# Altium PCB PCB2.PcbDoc
Units mm, origin at the board's own origin, x right, y up, seen from the top; angles counter-clockwise.
Board outline 152.4 x 101.6 mm, 2 copper layers (Top Layer, Bottom Layer); 27 components, 18 nets, 142 pads, 14 vias.
Unrouted connection lines stored in the file: 10.
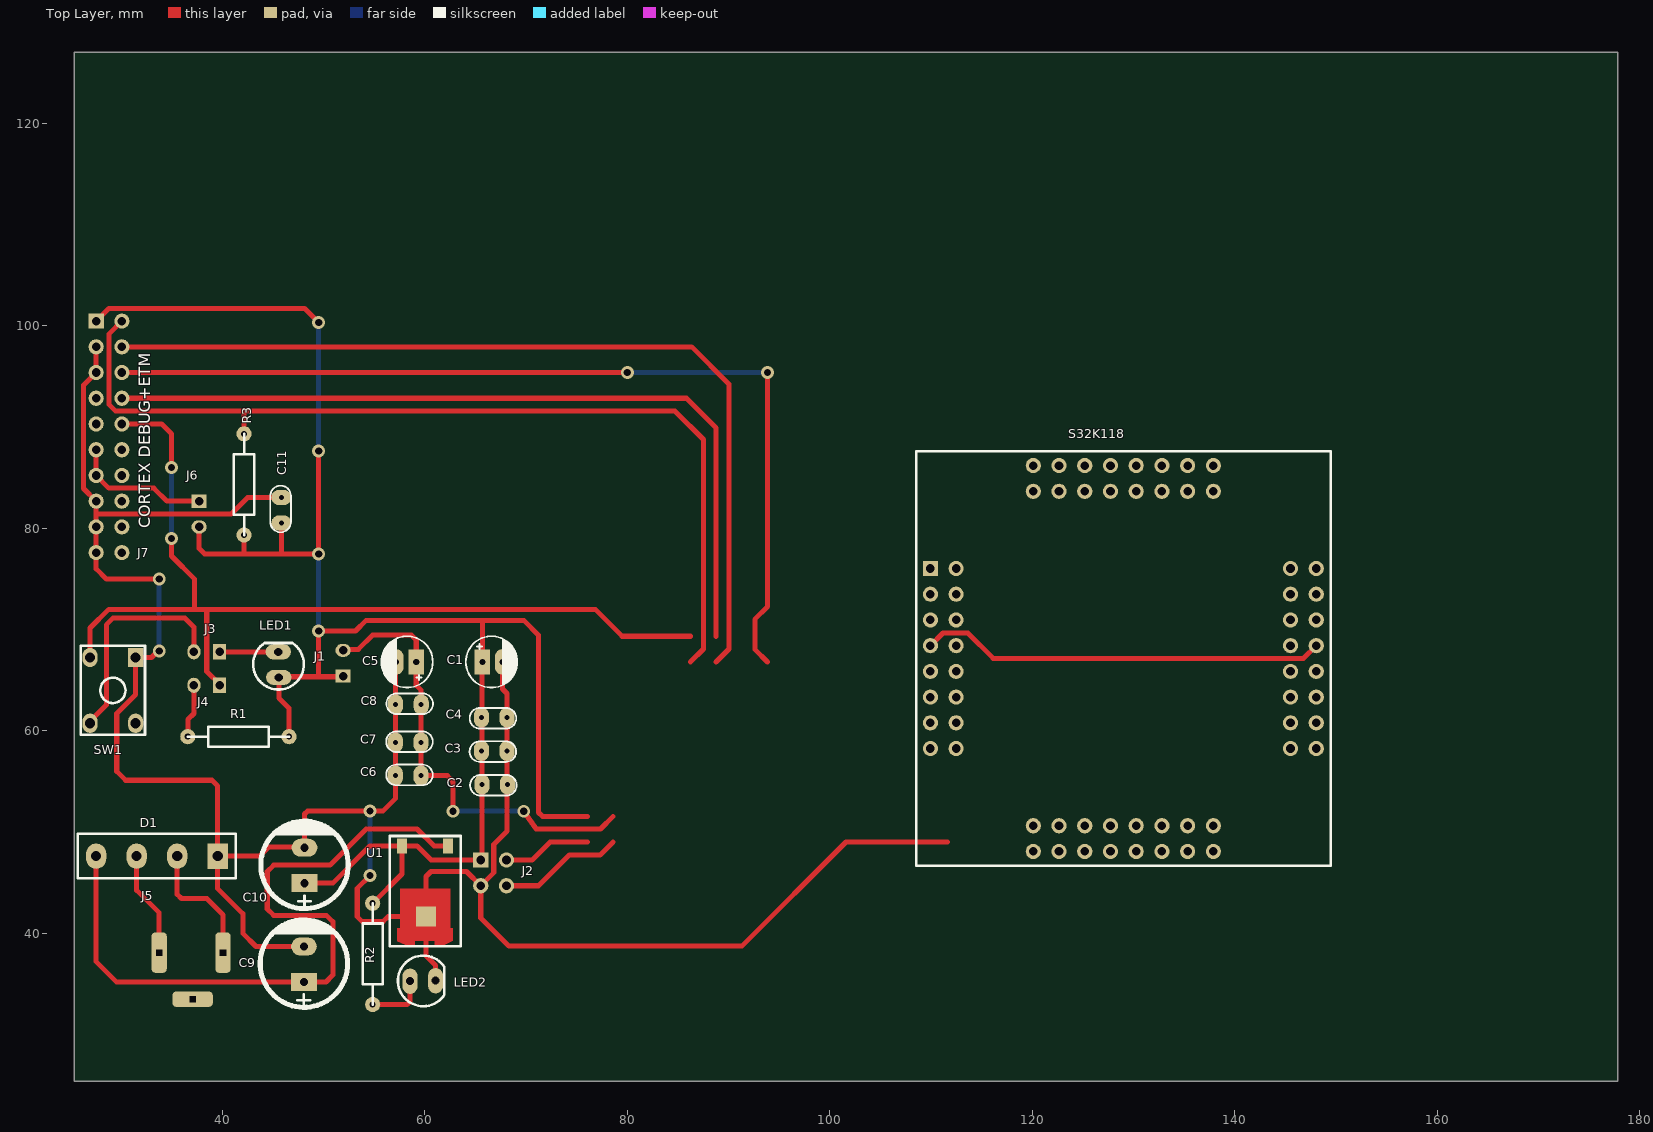
[diagram p0: Top Layer view]
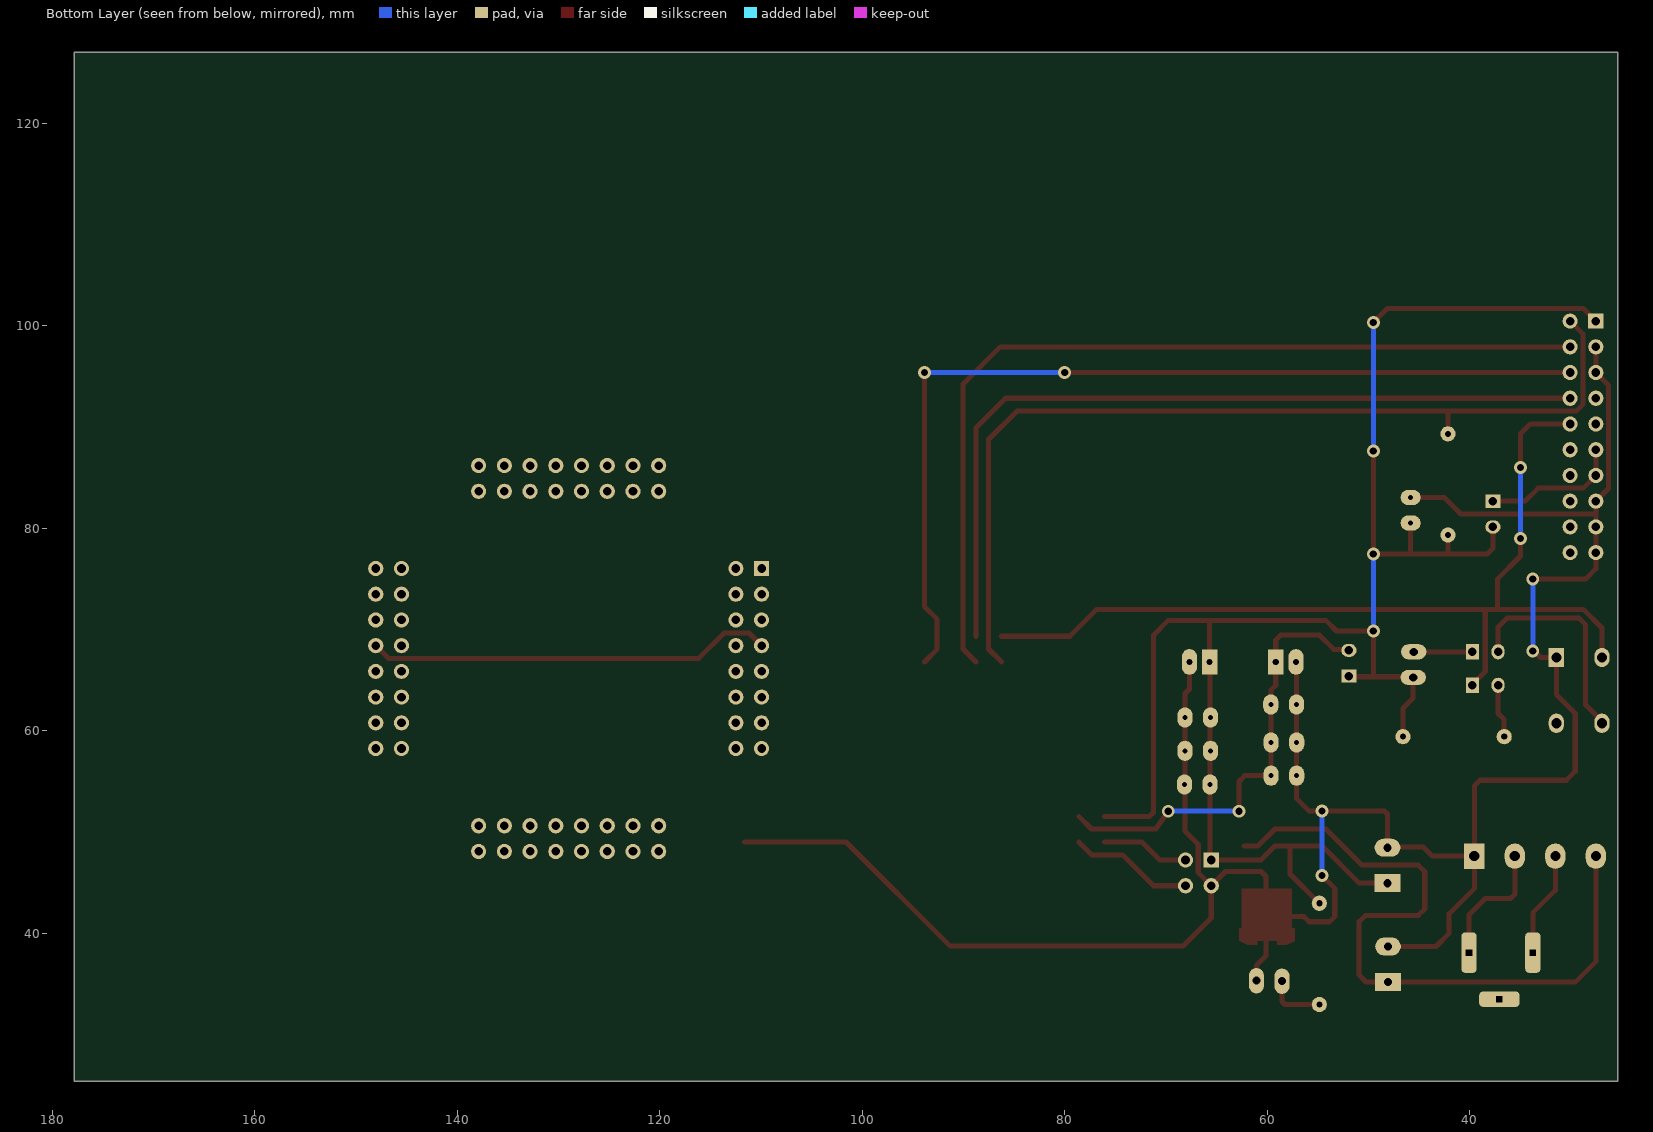
[diagram p1: Bottom Layer view, seen from below]

## Layer stack, top to bottom
Top Solder: solder mask 0.0102, Solder Resist, Dk 3.5
Top Layer: signal copper 0.0356
Dielectric 1: dielectric 0.32, FR-4, Dk 4.8
Bottom Layer: signal copper 0.0356
Bottom Solder: solder mask 0.0102, Solder Resist, Dk 3.5

## Board outline
25.4,25.4 177.8,25.4 177.8,127 25.4,127

## Design rules (kind name [scope] priority, off if disabled: settings)
Clearance [All] p1: gap=0.254 ignorepadtopadclearanceinfootprint=FALSE except(0: Arc-Hole Track-Hole SMDPad-Hole THPad-Hole Via-Hole Fill-Hole Poly-Hole Region-Hole Text-Hole)
PolygonConnect [All] p1: connectstyle=Relief reliefconductorwidth=0.254 reliefentries=4 polygonreliefangle="90 Angle" airgapwidth=0.254
RoutingVias [All] p1: holewidth=0.711 width=1.27 viastyle="Through Hole" minholewidth=0.711 minwidth=1.27 maxholewidth=0.711 maxwidth=1.27
SolderMaskExpansion [All] p1: expansion=0.102
Width [All] p1: maxlimit=1 minlimit=0.5 preferedwidth=0.5
30 further rules are at their usual default settings.

## Components (designator, comment, footprint, x,y, rotation, side; value= is the part's Value field where it differs from the comment)
C1 "10uF" "CP 4mm" 66.691,66.802 r0 top
C2 "CN 33pF" CN5 66.975,54.725 r0 top
C3 "CN 33pF" CN5 66.925,58.05 r0 top
C4 "CN 33pF" CN5 66.929,61.341 r0 top
C5 "10uF" "CP 4mm" 58.166,66.802 r180 top
C6 "CN 33pF" CN5 58.3,55.55 r180 top
C7 "CN 33pF" CN5 58.3,58.825 r180 top
C8 "CN 33pF" CN5 58.325,62.575 r180 top
C9 "470uF" "CP 7mm" 48.077,36.957 r90 top
C10 "470uF" "CP 7mm" 48.133,46.708 r90 top
C11 "0.1uF" CN5 45.872,81.718 r270 top
D1 "Diode" DIODE_bridge_2a 33.56,47.625 r180 top
J1 "Header 1x2 TH Pitch 2.54mm" "Header 1x2 TH Pitch 2.54mm" 51.943,66.675 r90 top
J2 "Header 2x2 TH Pitch 2.54mm" "Header 2x2 TH Pitch 2.54mm" 66.802,45.974 r0 top
J3 "Header 1x2 TH Pitch 2.54mm" "Header 1x2 TH Pitch 2.54mm" 38.481,67.803 r180 top
J4 "Header 1x2 TH Pitch 2.54mm" "Header 1x2 TH Pitch 2.54mm" 38.481,64.495 r180 top
J5 "Connector" JACK-DC 26.282,38.1 r270 top
J6 "Header 1x2 TH Pitch 2.54mm" "Header 1x2 TH Pitch 2.54mm" 37.719,81.407 r270 top
J7 "Header 10x2 TH Pitch 2.54mm" "Header 10x2 TH Pitch 2.54mm" 28.829,89.027 r0 top
LED1 "5mm" "LED 5mm BLUE" 45.568,66.54 r90 top
LED2 "5mm" "LED 5mm BLUE" 59.817,35.306 r0 top
R1 "10k" "RES 0.25A" 41.606,59.421 r0 top
R2 "10k" "RES 0.25A" 54.864,37.973 r90 top
R3 "10K" "RES 0.25A" 42.164,84.328 r270 top
S32K118 "Arm® Cortex®-M" "QFP64_0.5 SOCKET PINOUT" 128.985,67.14 r180 top
SW1 "Button" BUTTON_HOLE_5.0mm 29.21,63.993 r0 top
U1 "LM7805" TO252-3 60.025,44.055 r180 top

## Footprints (in the part's own frame and the unit in brackets; to place one, negate y for a bottom-side part, rotate by r counter-clockwise, add the part's x,y. Pads: shape width x height; smd on the part's side, far side on the other; paste and mask are expansions set on the pad)
BUTTON_HOLE_5.0mm [mm]
  rect 1.5x1.9 hole 1: 1(2.25,3.25)
  oval 1.5x1.9 hole 1: 2(2.25,-3.25) 3(-2.25,3.25) 4(-2.25,-3.25)
  silkscreen extent -3.17,-4.4 3.17,4.43, body extent -3,-3.86 3,3.86, height 5
CN5 [mm]
  oval 1.5x2 hole 0.5: 1(-1.325,-0.025) 2(1.2,-0.025)
  silkscreen extent -2.49,-1.12 2.1,0.92, body extent -3,-0.86 2.84,0.83, height 6.73
"CP 4mm" [mm]
  rect 1.5x2.5 hole 0.6: 1(-1,0)
  oval 1.5x2.54 hole 0.6: 2(1,0)
  silkscreen extent -2.63,-2.54 2.51,2.54, body extent -2.53,-2.53 2.52,2.53, height 7.29
"CP 7mm" [mil]
  rect 70x100 hole 32: 1(-68.9,0)
  oval 70x100 hole 32: 2(68.9,0)
  silkscreen extent -168,-170 172,170, body extent -158,-157 157,157, height 446
DIODE_bridge_2a [mm]
  rect 2x2.5 hole 1: 1(-6,0)
  oval 2x2.5 hole 1: 2(-2,0) 3(2,0) 4(6,0)
  silkscreen extent -7.8,-2.2 7.8,2.2, body extent -7.5,-1.9 7.5,1.9, height 11
"Header 1x2 TH Pitch 2.54mm" [mm]
  rect 1.3x1.5 hole 0.85: 1(-1.27,0)
  oval 1.3x1.5 hole 0.85: 2(1.27,0)
  body extent -2.54,-1.27 2.54,1.27, height 9.5
"Header 2x2 TH Pitch 2.54mm" [mm]
  rect 1.5x1.5 hole 0.85: 1(-1.27,1.27)
  round 1.5 hole 0.85: 2(1.27,1.27) 3(-1.27,-1.27) 4(1.27,-1.27)
  body extent -2.54,-2.54 2.54,2.54, height 9.5
"Header 10x2 TH Pitch 2.54mm" [mm]
  rect 1.5x1.5 hole 0.85: 1(-1.27,11.43)
  round 1.5 hole 0.85: 2(1.27,11.43) 3(-1.27,8.89) 4(1.27,8.89) 5(-1.27,6.35) 6(1.27,6.35) 7(-1.27,3.81) 8(1.27,3.81) 9(-1.27,1.27) 10(1.27,1.27) 11(-1.27,-1.27) 12(1.27,-1.27) 13(-1.27,-3.81) 14(1.27,-3.81) 15(-1.27,-6.35) 16(1.27,-6.35) 17(-1.27,-8.89) 18(1.27,-8.89) 19(-1.27,-11.43) 20(1.27,-11.43)
  body extent -2.54,-12.7 2.54,12.7, height 9.5
JACK-DC [mm]
  rrect50% 1.5x4 hole 0.6 square: 1(4.6,10.8)
  rrect50% 4x1.5 hole 0.6 square: 2(0,7.5) 3(0,13.8)
  body extent -4.55,-0.78 4.85,14.43, height 11
"LED 5mm BLUE" [mm]
  oval 1.5x2.5 hole 0.8: 1(-1.262,-0.025) 2(1.263,0.025)
  silkscreen extent -2.46,-2.5 2.13,2.5, body extent -2.76,-2.82 2.56,2.83, height 8
"QFP64_0.5 SOCKET PINOUT" [mm]
  rect 1.5x1.5 hole 0.85: 1(19.05,-8.89)
  round 1.5 hole 0.85: 2(16.51,-8.89) 3(19.05,-6.35) 4(16.51,-6.35) 5(19.05,-3.81) 6(16.51,-3.81) 7(19.05,-1.27) 8(16.51,-1.27) 9(19.05,1.27) 10(16.51,1.27) 11(19.05,3.81) 12(16.51,3.81) 13(19.05,6.35) 14(16.51,6.35) 15(19.05,8.89) 16(16.51,8.89) 17(8.89,19.05) 18(8.89,16.51) 19(6.35,19.05) 20(6.35,16.51) 21(3.81,19.05) 22(3.81,16.51) 23(1.27,19.05) 24(1.27,16.51) 25(-1.27,19.05) 26(-1.27,16.51) 27(-3.81,19.05) 28(-3.81,16.51) 29(-6.35,19.05) 30(-6.35,16.51) 31(-8.89,19.05) 32(-8.89,16.51) 33(-19.05,8.89) 34(-16.51,8.89) 35(-19.05,6.35) 36(-16.51,6.35) 37(-19.05,3.81) 38(-16.51,3.81) 39(-19.05,1.27) 40(-16.51,1.27) 41(-19.05,-1.27) 42(-16.51,-1.27) 43(-19.05,-3.81) 44(-16.51,-3.81) 45(-19.05,-6.35) 46(-16.51,-6.35) 47(-19.05,-8.89) 48(-16.51,-8.89) 49(-8.89,-19.05) 50(-8.89,-16.51) 51(-6.35,-19.05) 52(-6.35,-16.51) 53(-3.81,-19.05) 54(-3.81,-16.51) 55(-1.27,-19.05) 56(-1.27,-16.51) 57(1.27,-19.05) 58(1.27,-16.51) 59(3.81,-19.05) 60(3.81,-16.51) 61(6.35,-19.05) 62(6.35,-16.51) 63(8.89,-19.05) 64(8.89,-16.51)
  silkscreen extent -20.48,-20.48 20.45,20.48, body extent -20.32,-20.32 20.32,20.32, height 9.5
"RES 0.25A" [mm]
  round 1.5 hole 0.6: 1(-5,0) 2(5,0)
  silkscreen extent -5,-1 5,1, body extent -5.3,-1.31 5.3,1.3, height 7.8
TO252-3 [mm]
  rect 1x1.5 smd: 1(-2.284,-4.568) 3(2.262,-4.568)
  rect 2x2 smd: 2(-0.1,2.4)
  Top Layer region: -1.954,5.186 -2.767,4.779 -2.767,3.535 -2.513,3.535 -2.513,-0.351 2.44,-0.351 2.44,3.535 2.745,3.535 2.745,4.814 1.932,5.186 0.992,5.186 0.992,4.779 -0.989,4.779 -0.989,5.186
  silkscreen extent -3.53,-5.56 3.48,5.33, body extent -3.39,-4.93 3.34,5.17, height 2.37

## Part data
C1 C5: library part "CP 4mm"
C9 C10: library part "CP 7mm"
C11: library part "CN 33pF", LatestRevisionDate=17-Jul-2002, LatestRevisionNote="Re-released for DXP Platform.", PackageDescription="Radial Cap, Thru-Hole; 2 Leads; 0.3 in Pin Spacing", PackageReference=RAD-0.3, Published=8-Jun-2000, Publisher="Altium Limited"
D1: library part "Diode Bridge1", DatasheetVersion=E2732B, LatestRevisionDate=29-May-2009, LatestRevisionNote="Sch pins A & K swapped.", PackageDescription="Bridge Rectifier; 4 Terminals; Body 9.4 x 9.4 mm (typ); Pitch 5.08 mm", PackageReference=D-38, Published=8-Jun-2000, Publisher="Altium Limited"
J5: library part JackDC
LED1 LED2: library part "LED 5mm"
R1 R2 R3: library part "Res 0.25W"
S32K118: library part S32K118, "S32K is a scalable family of AEC-Q100 qualified 32-bit Arm® Cortex®-M4F and Cortex-M0+ based MCUs targeted for general purpose automotive and high-reliability industrial applications."
C2 C3 C4 C6 C7 C8: LatestRevisionDate=17-Jul-2002, LatestRevisionNote="Re-released for DXP Platform.", PackageDescription="Radial Cap, Thru-Hole; 2 Leads; 0.3 in Pin Spacing", PackageReference=RAD-0.3, Published=8-Jun-2000, Publisher="Altium Limited"

## Via types
v1: diameter 1.27, hole 0.711, Top Layer to Bottom Layer, 14 vias

## Nets (pads, with @x,y where several pads share a name; then routed paths per layer and width w, separated by ;. In a path a pad name is that pad's centre, name@x,y a point inside that pad or via, vN(x,y) a via of type N, cw(c..) or ccw(c..) an arc to the next point about the centre after c; other vN are vias at no path point)
GND: C1.2 C2.2 C3.2 C4.2 C5.2 C6.2 C7.2 C8.2 C9.2 C10.2 C11.1 D1.1 J2.3 J7.3 J7.5 J7.15 J7.17 J7.19 LED2.2 S32K118.40 SW1.1 U1.2 | length 251.5
  Top Layer w0.5: J7.3 J7.5 26.305,94.123 26.305,83.931 J7.15 27.559,81.407 ; v1(33.782,67.893) 33.67,67.893 33.02,67.243 SW1.1 31.46,63.591 29.591,61.722 29.591,56.007 30.48,55.118 38.989,55.118 39.56,54.547 D1.1 ; v1(33.782,75) 28.559,75 27.559,76 J7.19 J7.17 27.559,81.407 ; C11.1 42.53,83.043 40.894,81.407 27.559,81.407 ; C9.2 43.335,38.707 42.037,40.005 42.037,41.936 39.56,44.413 D1.1 ; v1(54.61,45.72) 53.34,44.45 53.34,41.655 53.847,41.148 55.859,41.148 56.366,41.655 U1.2 ; C5.2 57.129,66.766 57.129,53.34 55.859,52.07 v1(54.61,52.07) 48.426,52.07 48.133,51.777 C10.2 48.077,48.514 44.577,48.514 43.688,47.625 D1.1 ; LED2.2 61.08,36.83 60.125,37.785 U1.2 ; C1.2 67.691,64.135 68.129,63.697 C4.2 68.129,58.025 68.129,54.7 68.129,50.095 66.818,48.784 66.818,45.99 J2.3 ; 111.633,49.022 101.6,49.022 91.313,38.735 68.326,38.735 65.532,41.529 J2.3 ; U1.2 60.125,45.615 60.611,46.101 64.135,46.101 J2.3
  Bottom Layer w0.5: v1(33.782,67.893) v1(33.782,75) ; v1(54.61,45.72) v1(54.61,52.07)
NetC5_1: C5.1 C6.1 C7.1 C8.1 J1.2 S32K118.8 | length 45.2
  Top Layer w0.5: J1.2 52.046,68.048 53.443,68.048 54.864,69.469 58.674,69.469 59.166,68.977 C5.1 59.166,64.495 59.618,64.043 C6.1@59.618,55.575 ; C6.1 62.23,55.575 62.798,55.007 v1(62.798,52.064) ; v1(69.783,52.064) 71.009,50.308 77.359,50.308 78.613,51.562
  Bottom Layer w0.5: v1(62.798,52.064) v1(69.783,52.064)
NetC9_1: C9.1 D1.4 U1.1 | length 71.2
  Top Layer w0.5: D1.4 27.56,37.21 29.591,35.179 48.049,35.179 C9.1 50.245,35.207 50.927,35.889 50.927,41.148 50.292,41.783 45.085,41.783 44.45,42.418 44.45,46.101 45.085,46.736 50.649,46.736 54.221,50.308 59.245,50.308 60.931,48.623 U1.1
NetD1_2: D1.2 J5.3 | length 12.9
  Top Layer w0.5: D1.2 35.56,43.854 35.98,43.434 38.481,43.434 40.082,41.833 J5.3
NetD1_3: D1.3 J5.2 | length 10.4
  Top Layer w0.5: D1.3 31.56,44.259 33.782,42.037 J5.2
NetJ2_2: J2.2 S32K118.9 | length 8.7
  Top Layer w0.5: J2.2 70.612,47.244 72.39,49.022 76.073,49.022
NetJ2_4: J2.4 S32K118.10 | length 12.3
  Top Layer w0.5: J2.4 71.247,44.704 74.279,47.736 77.327,47.736 78.613,49.022
NetJ3_1: J3.1 LED1.2 | length 5.8
  Top Layer w0.5: J3.1@39.828,67.93 39.955,67.803 LED1.2
NetJ3_2: J3.2 SW1.4 | length 22.1
  Top Layer w0.5: SW1.4 26.96,60.943 28.559,62.542 28.559,70.469 29.21,71.12 36.32,71.12 37.211,70.229 J3.2
NetJ4_2: J4.2 R1.1 | length 5.3
  Top Layer w0.5: R1.1 36.606,61.117 37.211,61.722 J4.2
NetLED2_1: LED2.1 R2.1 | length 5.8
  Top Layer w0.5: R2.1 58.246,32.973 58.554,33.281 LED2.1
PTA4/JTAG_TMS/SWD_DIO: J7.2 R3.1 S32K118.64 | length 93.6
  Top Layer w0.5: J7.2@30.122,100.48 J7.2 28.845,99.203 28.845,92.202 29.48,91.567 42.164,91.567 ; R3.1 42.164,91.567 ; 86.233,66.802 87.519,68.088 87.519,88.757 84.709,91.567 42.164,91.567
PTA5/TCLK1_2/RESET: J4.1 J7.10 S32K118.63 SW1.3 | length 95.7
  Top Layer w0.5: SW1.3 26.96,70.147 28.813,72 37.288,72 ; J7.10 34.031,90.297 35,89.328 v1(35,86) ; v1(35,79) 35,77.258 37.288,74.97 37.288,72 ; J4.1 39.751,64.595 38.481,65.865 38.481,72 ; 86.233,69.342 79.502,69.342 76.844,72 38.481,72 ; 37.288,72 38.481,72
  Bottom Layer w0.5: v1(35,79) v1(35,86)
PTA10/FTM1_CH4/JTAG_TDO/noetm_Trace_SWO: J7.6 S32K118.58 | length 93.4
  Top Layer w0.5: J7.6 v1(80.01,95.377) ; 93.853,66.802 92.599,68.056 92.599,71.009 93.853,72.263 v1(93.853,95.377)
  Bottom Layer w0.5: v1(80.01,95.377) v1(93.853,95.377)
PTC4/ACMP0_IN2/JTAG_TCLK/SWD_CLK: J7.4 S32K118.62 | length 89.4
  Top Layer w0.5: J7.4 86.36,97.917 90.043,94.234 90.043,68.072 88.773,66.802
PTC5/JTAG_TDI/RTC_CLKOUT: J7.8 S32K118.61 | length 80.5
  Top Layer w0.5: J7.8 85.852,92.837 88.773,89.916 88.773,69.342
TGT_PWR: J6.1 J7.11 J7.13 | length 13.8
  Top Layer w0.5: J7.11 J7.13 28.813,83.963 33.258,83.963 34.544,82.677 J6.1
VCC: C1.1 C2.1 C3.1 C4.1 C10.1 C11.2 J1.1 J2.1 J6.2 J7.1 LED1.1 R1.2 R2.2 R3.2 S32K118.7 S32K118.41 U1.3 | length 225.3
  Top Layer w0.5: J7.1 28.813,101.711 48.149,101.711 v1(49.53,100.33) ; J6.2 37.719,78.02 38.269,77.47 42.164,77.47 ; R3.2 42.164,77.47 ; C11.2 45.847,77.47 ; R1.2 46.606,62.23 45.593,63.243 LED1.1 45.657,65.341 49.53,65.341 ; C10.1 50.919,44.958 54.584,48.623 U1.3 ; v1(49.53,87.63) v1(49.53,77.47) 45.847,77.47 ; J1.1 51.88,65.341 49.53,65.341 ; R2.2 57.763,45.872 U1.3 ; 76.073,51.562 71.628,51.562 71.247,51.943 71.247,69.449 69.783,70.913 65.691,70.913 ; S32K118.7 111.189,69.664 113.634,69.664 116.142,67.156 146.781,67.156 S32K118.41 ; 42.164,77.47 45.847,77.47 ; 49.53,65.341 v1(49.53,69.85) 53.158,69.85 54.221,70.913 65.691,70.913 ; U1.3 59.255,48.623 60.634,47.244 J2.1 65.65,47.362 C2.1 65.65,58.025 65.65,61.316 65.65,66.761 C1.1 65.691,70.913
  Bottom Layer w0.5: v1(49.53,69.85) v1(49.53,77.47) ; v1(49.53,87.63) v1(49.53,100.33)
pads on no net: J5.1 J7.7 J7.9 J7.12 J7.14 J7.16 J7.18 J7.20 S32K118.1 S32K118.2 S32K118.3 S32K118.4 S32K118.5 S32K118.6 S32K118.11 S32K118.12 S32K118.13 S32K118.14 S32K118.15 S32K118.16 S32K118.17 S32K118.18 S32K118.19 S32K118.20 S32K118.21 S32K118.22 S32K118.23 S32K118.24 S32K118.25 S32K118.26 S32K118.27 S32K118.28 S32K118.29 S32K118.30 S32K118.31 S32K118.32 S32K118.33 S32K118.34 S32K118.35 S32K118.36 S32K118.37 S32K118.38 S32K118.39 S32K118.42 S32K118.43 S32K118.44 S32K118.45 S32K118.46 S32K118.47 S32K118.48 S32K118.49 S32K118.50 S32K118.51 S32K118.52 S32K118.53 S32K118.54 S32K118.55 S32K118.56 S32K118.57 S32K118.59 S32K118.60 SW1.2

## Silkscreen, mask and mechanical layers (free items; w line width, h text height)
Top Overlay:
  text "CORTEX DEBUG+ETM" at 33.274,80 h2 r90